# Altium PCB PCB1regülatör.PcbDoc
Units mm, origin at the board's own origin, x right, y up, seen from the top; angles counter-clockwise.
Board outline 26.42 x 7.62 mm, 2 copper layers (Top Layer, Bottom Layer); 5 components, 3 nets, 17 pads, 3 vias.
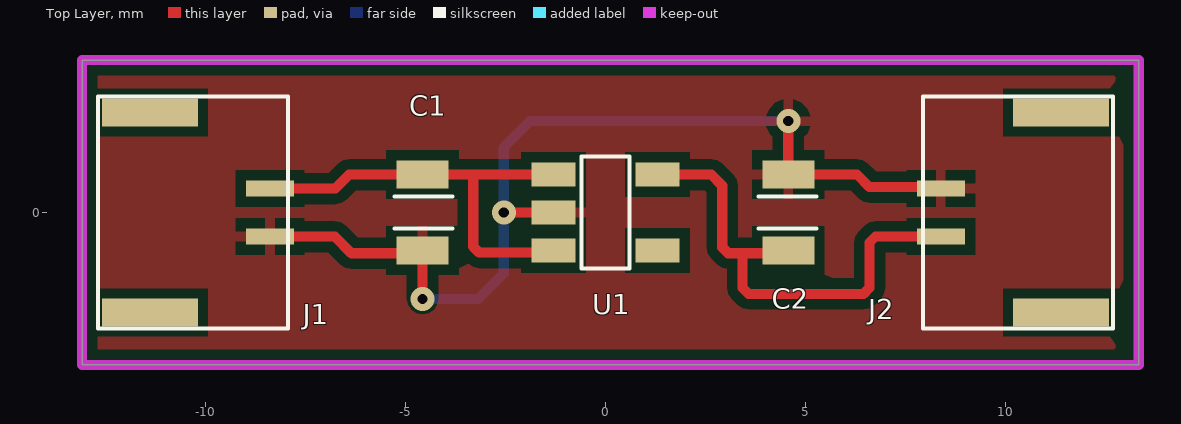
[diagram p0: Top Layer view]
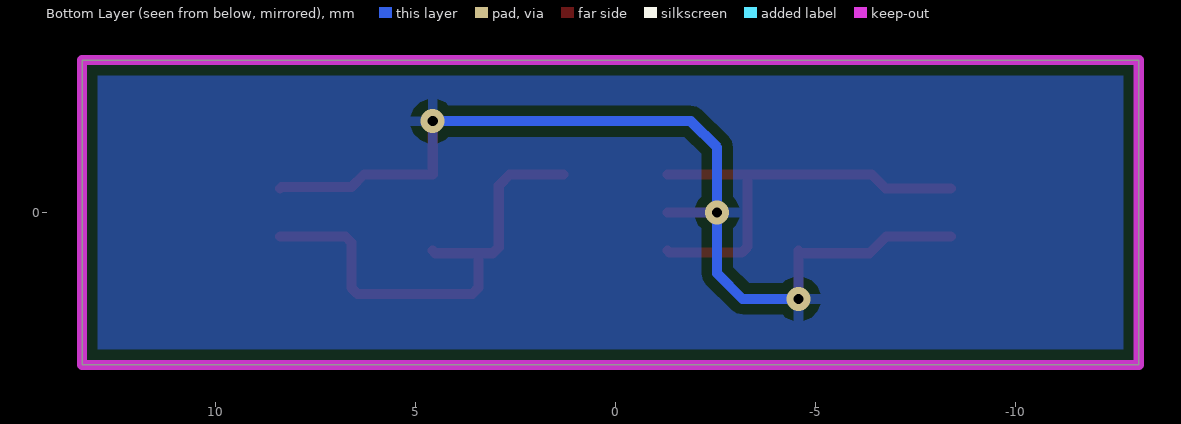
[diagram p1: Bottom Layer view, seen from below]
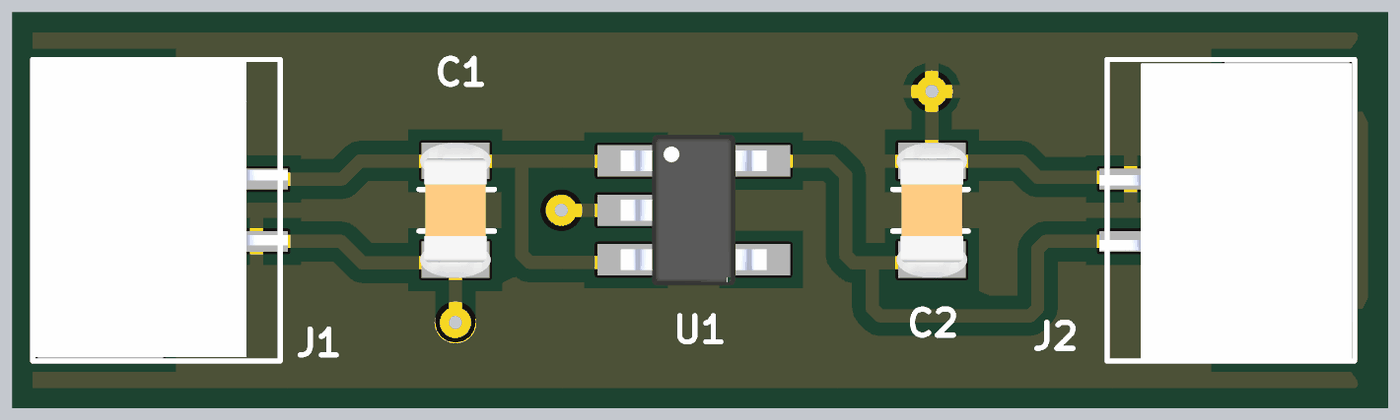
[diagram p2: 3D render of the assembled board from above, using the file's embedded part models]

## Layer stack, top to bottom
Top Solder: solder mask 0.0102, Solder Resist, Dk 3.5
Top Layer: signal copper 0.0356
Dielectric 1: dielectric 0.32, FR-4, Dk 4.8
Bottom Layer: signal copper 0.0356
Bottom Solder: solder mask 0.0102, Solder Resist, Dk 3.5

## Board outline
-13.081,-3.81 -13.081,3.81 13.335,3.81 13.335,-3.81

## Design rules (kind name [scope] priority, off if disabled: settings)
Clearance [All] p1: gap=0.254 ignorepadtopadclearanceinfootprint=FALSE
PolygonConnect [All] p1: connectstyle=Relief reliefconductorwidth=0.254 reliefentries=4 polygonreliefangle="90 Angle" airgapwidth=0.254
RoutingVias [All] p1: holewidth=0.711 width=1.27 viastyle="Through Hole" minholewidth=0.711 minwidth=1.27 maxholewidth=0.711 maxwidth=1.27
SolderMaskExpansion [All] p1: expansion=0.102 istentingtop=FALSE
SupplyNets "Schematic Supply Nets_2" [InNet('3.3VDC')] p1: voltage=0.000
SupplyNets "Schematic Supply Nets_1" [InNet('5VDC')] p2: voltage=0.000
SupplyNets "Schematic Supply Nets" [InNet('GND')] p3: voltage=0.000
Width [All] p1: maxlimit=0.254 minlimit=0.254 preferedwidth=0.254
30 further rules are at their usual default settings.

## Components (designator, comment, footprint, x,y, rotation, side; value= is the part's Value field where it differs from the comment)
C1 "CAP PER 1uF 35V" CAP_0805 -4.572,0 r90 top value=1µF
C2 "CAP PER 1uF 35V" CAP_0805 4.572,0 r270 top value=1µF
J1 "SM02B-GHS-TB" SM02B-GHS-TB(LF)(SN) -10.287,0 r270 top
J2 "SM02B-GHS-TB" SM02B-GHS-TB(LF)(SN) 10.287,0 r90 top
U1 "Regulator" SOT23-5 0,0 r0 top

## Footprints (in the part's own frame and the unit in brackets; to place one, negate y for a bottom-side part, rotate by r counter-clockwise, add the part's x,y. Pads: shape width x height; smd on the part's side, far side on the other; paste and mask are expansions set on the pad)
CAP_0805 [mm]
  rect 0.7x1.3 smd mask+0.05: 1(-0.95,0) 2(0.95,0)
  silkscreen extent -0.4,-0.75 0.4,0.7, body extent -1.3,-0.68 1.3,0.68, height 0.9
SM02B-GHS-TB(LF)(SN) [mm]
  rect 0.4x1.2 smd mask+0.05: 1(-0.6,1.9) 2(0.6,1.9)
  rect 0.7x2.4 smd mask+0.05: 3(-2.5,-1.1) 4(2.5,-1.1)
  silkscreen extent -2.9,-2.4 2.9,2.35, body extent -2.93,-2.35 2.83,2.5, height 4.25
SOT23-5 [mm]
  rect 1.1x0.6 smd mask+0.05: 1(-1.3,0.95) 2(-1.3,0) 3(-1.3,-0.95) 4(1.3,-0.95) 5(1.3,0.95)
  silkscreen extent -0.6,-1.4 0.6,1.4, body extent -1.4,-1.45 1.4,1.45, height 1.45

## Part data
C1 C2: "Tantalum Capacitor, Polarized, Tantalum (solid Polymer), 35V, 20% +Tol, 20% -Tol, 1uF, Surface Mount, 0805", ESR (Equivalent Series Resistance)=500mΩ, Leakage Current=3.5µA, Manufacturer=Vishay, Manufacturer Part Number=T58W9105M035C0500, Max Operating Temperature=105°C, Min Operating Temperature=-55°C, Ripple Current=283mA, Supplier Part Number=3297993, Voltage Rating (DC)=35V, Category="Tantalum Capacitors", China RoHS=Compliant, ComponentLink1Description=https://datasheet.octopart.com:443/T58W9105M035C0500-Vishay-datasheet-182138793.pdf?src-supplier=IHS, ComponentLink1URL=https://datasheet.octopart.com:443/T58W9105M035C0500-Vishay-datasheet-182138793.pdf?src-supplier=IHS, ComponentLink2Description=https://datasheet.octopart.com:443/T58W9105M035C0500-Vishay-datasheet-181963491.pdf?src-supplier=Newark, ComponentLink2URL=https://datasheet.octopart.com:443/T58W9105M035C0500-Vishay-datasheet-181963491.pdf?src-supplier=Newark, ComponentLink3Description=https://datasheet.octopart.com:443/T58W9105M035C0500-Vishay-datasheet-76796261.pdf?src-supplier=element14+APAC, ComponentLink3URL=https://datasheet.octopart.com:443/T58W9105M035C0500-Vishay-datasheet-76796261.pdf?src-supplier=element14+APAC, ComponentLink4Description=https://datasheet.octopart.com:443/T58W9105M035C0500-Vishay-datasheet-95510002.pdf?src-supplier=Future+Electronics, ComponentLink4URL=https://datasheet.octopart.com:443/T58W9105M035C0500-Vishay-datasheet-95510002.pdf?src-supplier=Future+Electronics, ComponentLink5Description=http://sigma.octopart.com:80/rohs_statement/Vishay-company-15.pdf?src-supplier=Compliance+Statements, ComponentLink5URL=http://sigma.octopart.com:80/rohs_statement/Vishay-company-15.pdf?src-supplier=Compliance+Statements, Height=900µm, Length=2mm, Lifecycle Status=Production, Mounting Technology="Surface Mount", Number of Terminals=2, Packaging="Cut Tape", Pricing="4000=0,221 (EUR)", RoHS=Compliant, Schedule B="8532210050, 8532210050|8532210050|8532210050|8532210050|8532210050", Stock=4000, Supplier=Farnell, Width=1.25mm
J1 J2: "Conn Shrouded Header HDR 2 POS 1.25mm Solder RA Side Entry SMD T/R", Color=Natural, Contact Resistance=50mΩ, Current Rating=1A, Dielectric Material=Polyamide, Manufacturer=JST, Manufacturer Part Number=SM02B-GHS-TB(LF)(SN), Max Operating Temperature=85°C, Min Operating Temperature=-25°C, Supplier Part Number="SM02B-GHS-TB (LF)(SN)", Voltage Rating=50V, Insulation Resistance=100MΩ, Category="Headers and Wire Housings", China RoHS=Compliant, ComponentLink1Description=https://datasheet.octopart.com:443/SM02B-GHS-TB%28LF%29%28SN%29-JST-datasheet-151632282.pdf?src-supplier=Upverter, ComponentLink1URL=https://datasheet.octopart.com:443/SM02B-GHS-TB%28LF%29%28SN%29-JST-datasheet-151632282.pdf?src-supplier=Upverter, ComponentLink2Description=https://datasheet.octopart.com:443/SM02B-GHS-TB%28LF%29%28SN%29-JST-datasheet-10511.pdf?src-supplier=Farnell, ComponentLink2URL=https://datasheet.octopart.com:443/SM02B-GHS-TB%28LF%29%28SN%29-JST-datasheet-10511.pdf?src-supplier=Farnell, ComponentLink3Description=https://datasheet.octopart.com:443/SM02B-GHS-TB-%28LF%29%28SN%29-JST-datasheet-28358378.pdf?src-supplier=TME, ComponentLink3URL=https://datasheet.octopart.com:443/SM02B-GHS-TB-%28LF%29%28SN%29-JST-datasheet-28358378.pdf?src-supplier=TME, ComponentLink4Description=https://datasheet.octopart.com:443/SM02B-GHS-TB%28LF%29%28SN%29-JST-datasheet-13551083.pdf?src-supplier=Future+Electronics, ComponentLink4URL=https://datasheet.octopart.com:443/SM02B-GHS-TB%28LF%29%28SN%29-JST-datasheet-13551083.pdf?src-supplier=Future+Electronics, ComponentLink5Description=https://datasheet.octopart.com:443/SM02B-GHS-TB%28LF%29%28SN%29-JST-datasheet-12527556.pdf?src-supplier=Future+Electronics, ComponentLink5URL=https://datasheet.octopart.com:443/SM02B-GHS-TB%28LF%29%28SN%29-JST-datasheet-12527556.pdf?src-supplier=Future+Electronics, ComponentLink6Description=https://datasheet.octopart.com:443/SM02B-GHS-TB%28LF%29%28SN%29-JST-datasheet-137194309.pdf?src-supplier=Component+Distributors+Inc., ComponentLink6URL=https://datasheet.octopart.com:443/SM02B-GHS-TB%28LF%29%28SN%29-JST-datasheet-137194309.pdf?src-supplier=Component+Distributors+Inc., Connector Type="Male Pin, Outer Shroud Contact", Contact Gender=Male, Contact Material="Copper, Tin", Contact Plating=Tin, Fastening Type="Latch, Ramp", Height=4.25mm, Housing Color=Natural, Housing Material=Nylon, Lead Free="Lead Free", Lifecycle Status=Production, Mounting Technology="Surface Mount", Number of Contacts=2, Number of Positions=2, Number of Rows=1, Pins=2, Pitch=1.2446mm, Pricing="2500=0,1022, 5000=0,099, 10000=0,097 (USD)", REACH SVHC=Yes, RoHS=Compliant, Stock=12500, Supplier="Arrow Electronics", Terminal Pitch=1.25mm, Termination=Solder
U1: library part MIC5317-3.3YM5-TR, "Fixed LDO Voltage Regulator, 2.5V to 6V, 155mV drop, 3.3V/150mA out, SOT-23-5", Dropout Voltage=155mV, Manufacturer=Microchip, Max Operating Temperature=125°C, Max Supply Voltage=6V, Min Current Limit=200mA, Min Operating Temperature=-40°C, Min Input Voltage=2.5V, Output Current=150mA, Output Voltage=3.3V, Power Supply Rejection Ratio (PSRR)=70dB, Supplier Part Number=2920683, Category="LDO Voltage Regulators", ComponentLink1Description=https://datasheet.octopart.com:443/MIC5317-3.3YM5-TR-Microchip-datasheet-137319728.pdf?src-supplier=Newark, ComponentLink1URL=https://datasheet.octopart.com:443/MIC5317-3.3YM5-TR-Microchip-datasheet-137319728.pdf?src-supplier=Newark, ComponentLink2Description=https://datasheet.octopart.com:443/MIC5317-3.3YM5-TR-Microchip-datasheet-26354330.pdf?src-supplier=element14+APAC, ComponentLink2URL=https://datasheet.octopart.com:443/MIC5317-3.3YM5-TR-Microchip-datasheet-26354330.pdf?src-supplier=element14+APAC, ComponentLink3Description=https://datasheet.octopart.com:443/MIC5317-3.3YM5-TR-Microchip-datasheet-519557.pdf?src-supplier=Future+Electronics, ComponentLink3URL=https://datasheet.octopart.com:443/MIC5317-3.3YM5-TR-Microchip-datasheet-519557.pdf?src-supplier=Future+Electronics, ComponentLink4Description=http://sigma.octopart.com:80/188454461/materials_sheet/Microchip-MIC5317-3.3YM5-TR.pdf?src-supplier=Compliance+Statements, ComponentLink4URL=http://sigma.octopart.com:80/188454461/materials_sheet/Microchip-MIC5317-3.3YM5-TR.pdf?src-supplier=Compliance+Statements, ComponentLink5Description=http://sigma.octopart.com:80/rohs_statement/Microchip-company-71.pdf?src-supplier=Compliance+Statements, ComponentLink5URL=http://sigma.octopart.com:80/rohs_statement/Microchip-company-71.pdf?src-supplier=Compliance+Statements, ComponentLink6Description=http://sigma.octopart.com:80/reach_statement/Microchip-company-70.pdf?src-supplier=Compliance+Statements, ComponentLink6URL=http://sigma.octopart.com:80/reach_statement/Microchip-company-70.pdf?src-supplier=Compliance+Statements, ComponentLink7Description=http://sigma.octopart.com:80/conflict_mineral_statement/Microchip-company-69.pdf?src-supplier=Compliance+Statements, ComponentLink7URL=http://sigma.octopart.com:80/conflict_mineral_statement/Microchip-company-69.pdf?src-supplier=Compliance+Statements, ComponentLink8Description=http://sigma.octopart.com:80/conflict_mineral_statement/Microchip-company-68.pdf?src-supplier=Compliance+Statements, ComponentLink8URL=http://sigma.octopart.com:80/conflict_mineral_statement/Microchip-company-68.pdf?src-supplier=Compliance+Statements, Country of Assembly=Thailand, Country of Fabrication="United States of America", Country of Origin=Thailand, Export Control Classification Number (ECCN) Code=EAR99, Harmonized Tariff Schedule (HTS) Code=8542.39.0060, Lifecycle Status=Production, Manufacturer Part Number=MIC5317-3.3YM5-TR, Mounting Technology="Surface Mount", Number of Outputs=1, Number of Regulators=1, Output Type=Fixed, Pins=5, Pricing="1=0,217, 25=0,175, 100=0,158, 3000=0,156 (EUR)", Projected EOL Date=2039-09-30, RoHS=Compliant, Schedule B="8542390000, 8542390000|8542390000|8542390000|8542390000|8542390000", Stock=8681, Supplier=Farnell

## Via types
v1: diameter 0.6, hole 0.254, Top Layer to Bottom Layer, 3 vias

## Nets (pads, with @x,y where several pads share a name; then routed paths per layer and width w, separated by ;. In a path a pad name is that pad's centre, name@x,y a point inside that pad or via, vN(x,y) a via of type N, cw(c..) or ccw(c..) an arc to the next point about the centre after c; other vN are vias at no path point)
3.3VDC: C2.2 J2.1 U1.5 | length 12.2
  Top Layer w0.254: U1.5 2.645,0.95 2.921,0.674 2.921,-0.867 3.07,-1.016 3.429,-1.016 ; C2.2 4.506,-1.016 3.429,-1.016 ; J2.1 6.753,-0.6 6.604,-0.749 6.604,-1.883 6.455,-2.032 3.578,-2.032 3.429,-1.883 3.429,-1.016
5VDC: C1.2 J1.1 U1.1 U1.3 | length 11.1
  Top Layer w0.254: J1.1 -6.753,0.6 -6.403,0.95 C1.2 -3.302,0.95 ; U1.3 -1.351,-1.001 -3.153,-1.001 -3.302,-0.852 -3.302,0.95 ; U1.1 -3.302,0.95
GND: C1.1 C2.1 J1.2 J2.2 U1.2 | length 24.6
  Top Layer w0.254: J1.2 -6.766,-0.6 -6.35,-1.016 -4.638,-1.016 C1.1 v1(-4.572,-2.159) ; v1(-2.54,0) U1.2 ; v1(4.572,2.286) C2.1 6.289,0.95 6.604,0.635 8.352,0.635 J2.2
  Bottom Layer w0.254: v1(-4.572,-2.159) -3.175,-2.159 -2.54,-1.524 v1(-2.54,0) -2.54,1.629 -1.883,2.286 v1(4.572,2.286)
pads on no net: J1.3 J1.4 J2.3 J2.4 U1.4

## Polygon pours and split planes (outlines as drawn)
GND on Bottom Layer "GND_L02_P001" (solid, pour order 1): -12.954,3.595 -12.827,3.722 13.208,3.722 13.208,-3.644 13.335,-3.771 -13.081,-3.771
GND on Top Layer "GND_L01_P003" (solid, pour order 3): -12.7,3.556 -12.7,-3.429 12.954,-3.429 12.954,3.429

## Keep-outs
Keep-Out Layer:
  the board outline again, w0.254